# EAGLE board OeShield (EAGLE 7.2.0)

Size 58 x 68 mm. Coordinates in mm from the lower left corner, seen from the top.
Outline: 0,0 58,0 58,68 0,68 0,0
Copper layers (1*16): Top 0.035mm / dielectric 1.5mm / Bottom 0.035mm
Design rules "default": minimum track width 10mil, minimum drill 24mil, track to track 8mil, track to pad 8mil, pad to pad 8mil, via to via 8mil, smd to smd 8mil, copper to edge 40mil, drill to drill 8mil, minimum pad ring 10mil, minimum via ring 8mil, stop-mask expansion 4mil, vias tented up to drill 0mil, thermal gap 10mil

## Footprints (pad centres in the part's own frame; a part is rotated, then mirrored left to right if it is on the bottom)
2POL254 = drill 1.2 long: 1 -1.27,0; 2 1.27,0
C5B3 = drill 0.813 pad 1.6 octagon: 1 -2.54,0; 2 2.54,0
DO41-10 = drill 1.118 pad 1.93: A 5.08,0; C -5.08,0
DIL08 = drill 0.813 long: 1 -3.81,-3.81; 2 -1.27,-3.81; 3 1.27,-3.81; 4 3.81,-3.81; 5 3.81,3.81; 6 1.27,3.81; 7 -1.27,3.81; 8 -3.81,3.81
FE08 = drill 0.813 long: 1 -8.89,0; 2 -6.35,0; 3 -3.81,0; 4 -1.27,0; 5 1.27,0; 6 3.81,0; 7 6.35,0; 8 8.89,0
FE09-2 = drill 0.914: 1 -10.16,1.27 | drill 0.914 octagon: 2 -10.16,-1.27; 3 -7.62,1.27; 4 -7.62,-1.27; 5 -5.08,1.27; 6 -5.08,-1.27; 7 -2.54,1.27; 8 -2.54,-1.27; 9 0,1.27; 10 0,-1.27; 11 2.54,1.27; 12 2.54,-1.27; 13 5.08,1.27; 14 5.08,-1.27; 15 7.62,1.27; 16 7.62,-1.27; 17 10.16,1.27; 18 10.16,-1.27
FE10 = drill 0.813 long: 1 -11.43,0; 2 -8.89,0; 3 -6.35,0; 4 -3.81,0; 5 -1.27,0; 6 1.27,0; 7 3.81,0; 8 6.35,0; 9 8.89,0; 10 11.43,0
4POL254 = drill 1.2 long: 1 -3.81,0; 2 -1.27,0; 3 1.27,0; 4 3.81,0
3POL254 = drill 1.2 long: 1 -2.54,0; 2 0,0; 3 2.54,0
TO220V = drill 1.016 long: 1 -2.54,-2.54; 2 0,-2.54; 3 2.54,-2.54
0207/12 = drill 0.813 octagon: 1 -6.35,0; 2 6.35,0

## Placement (x,y rotation side)
+12V  [2POL254]  14.7,65.45 0 top
C1  100n  [C5B3]  18.79,47.51 0 top
C5  100n  [C5B3]  18.82,51.81 0 top
D1  1N4004  [DO41-10]  10.68,45.5 90 top
D_VALVE  [2POL254]  2.51,49.4 90 top
IC2  MAX3082  [DIL08]  43.65,13.95 90 top
J1  [FE08]  2.83,34.13 270 top
J2  [FE09-2]  4.35,12.1 270 top
J3  [FE10]  55.32,41.49 90 top
J4  [FE08]  55.32,18.37 90 top
JORDFUGT  [4POL254]  38.45,65.61 0 top
OE_BUS  [3POL254]  27.78,2.52 180 top
Q1  [TO220V]  0.85,61.15 90 top
R1  10k  [0207/12]  35.34,51.66 180 top
R6  10k  [0207/12]  35.22,48.74 0 top
R7  120  [0207/12]  27.44,12.26 0 top

## Library data of the parts
+12V D_VALVE JORDFUGT OE_BUS = con-phoenix-254; OC_FARNELL: unknown; OC_NEWARK: unknown
C1 C5 = capacitor-wima
D1 Q1 = adafruit
IC2 = myLibrary; OC_FARNELL: unknown; OC_NEWARK: unknown
J1-J4 = con-lsta; OC_FARNELL: unknown; OC_NEWARK: unknown
R1 R6 R7 = resistor

## Nets
D_VALVE_T1: C1.1 D1.C D_VALVE.1
D_VALVE_T2: D1.A D_VALVE.2 Q1.2
GND: +12V.1 C1.2 C5.2 IC2.5 J1.6 J1.7 J2.13 J3.7 JORDFUGT.4 OE_BUS.3 Q1.3 R1.2 R6.1
OE_DIFF+: IC2.7 OE_BUS.1 R7.2
OE_DIFF-: IC2.6 OE_BUS.2 R7.1
P0_0: J2.14 J4.5 Q1.1 R1.1
P0_1: J2.16
P0_2: J2.1
P0_3: J2.3
P0_4: IC2.1 J4.1
P0_5: IC2.4 J4.2
P0_6: J3.6
P0_7: IC2.2 IC2.3 J4.3 R6.2
P1_0: J2.18 J4.7
P1_1: J2.17
P1_2: J2.15
P1_3: J2.11
P1_4: J2.9
P1_5: J2.7
P1_7: J3.8
P2_0: J2.2
P2_1: J2.4
P2_2: J2.6
P2_3: J2.8
P2_4: J2.10
P2_5: J2.12
P2_6: J3.1
P2_7: J4.8
P3_0: J3.4
P3_1: J3.5
P3_4: J3.3
P3_5: J4.6
P3_6: J3.2
P3_7: J4.4
P4: J1.2
P4_0: J3.10 JORDFUGT.2
P4_1: J3.9 JORDFUGT.3
RESET: J1.3
V3.3: J1.4
VBUS: J1.5 JORDFUGT.1
VCC: +12V.2 C5.1 IC2.8
VDD: J2.5
VIN: J1.8

## Tracks (layer width: path | path; a pad name or v marks a point on that pad's centre or on a via)
D_VALVE_T1  (2 unrouted)
D_VALVE_T2  (2 unrouted)
GND  (12 unrouted)
OE_DIFF+  (2 unrouted)
OE_DIFF-  (2 unrouted)
P0_0  (3 unrouted)
P0_4  (1 unrouted)
P0_5  (1 unrouted)
P0_7  (3 unrouted)
P1_0  (1 unrouted)
P4_0  (1 unrouted)
P4_1  (1 unrouted)
VBUS  (1 unrouted)
VCC  (2 unrouted)